# Altium PCB main.PcbDoc
Units mil, origin at the board's own origin, x right, y up, seen from the top; angles counter-clockwise.
Board outline 4763.78 x 9724.41 mil, 2 copper layers (Top Layer, Bottom Layer); 65 components, 26 nets, 174 pads, 17 vias.
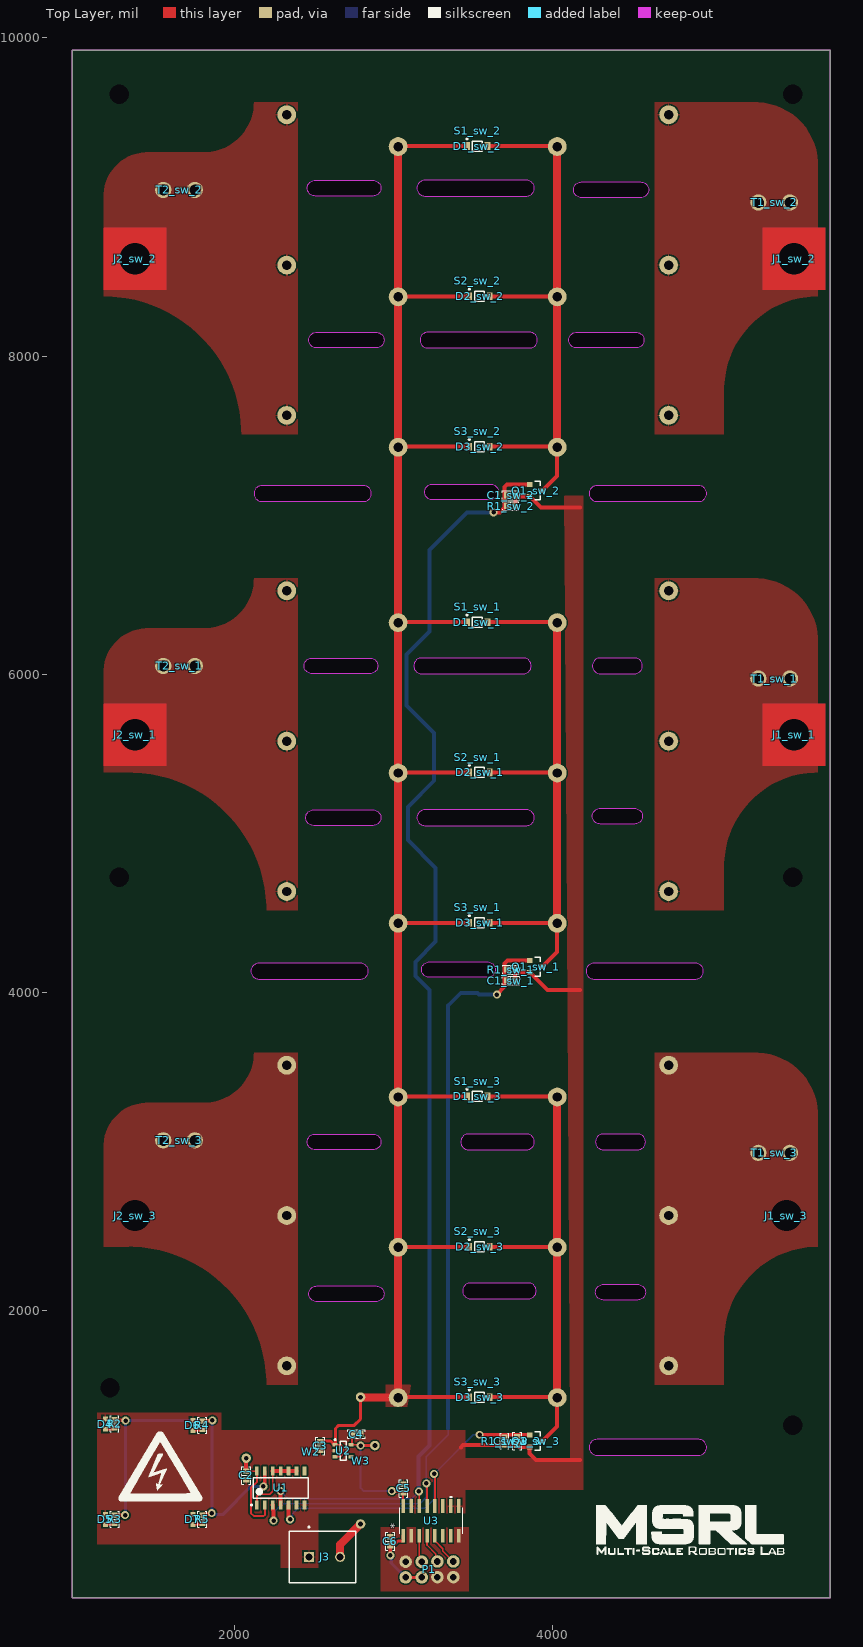
[diagram p0: Top Layer view]
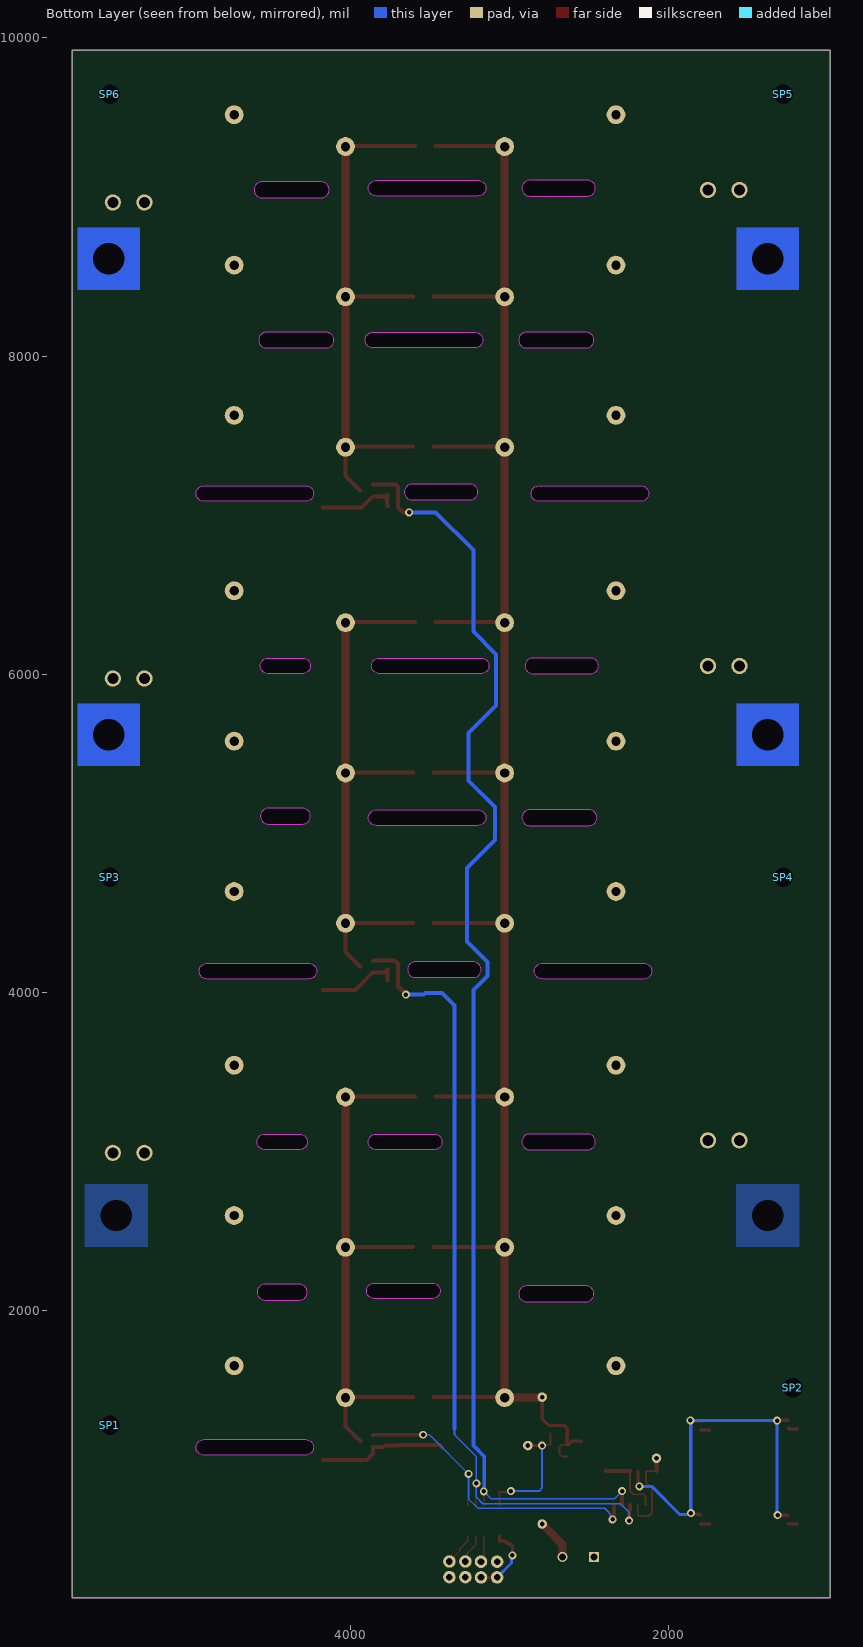
[diagram p1: Bottom Layer view, seen from below]
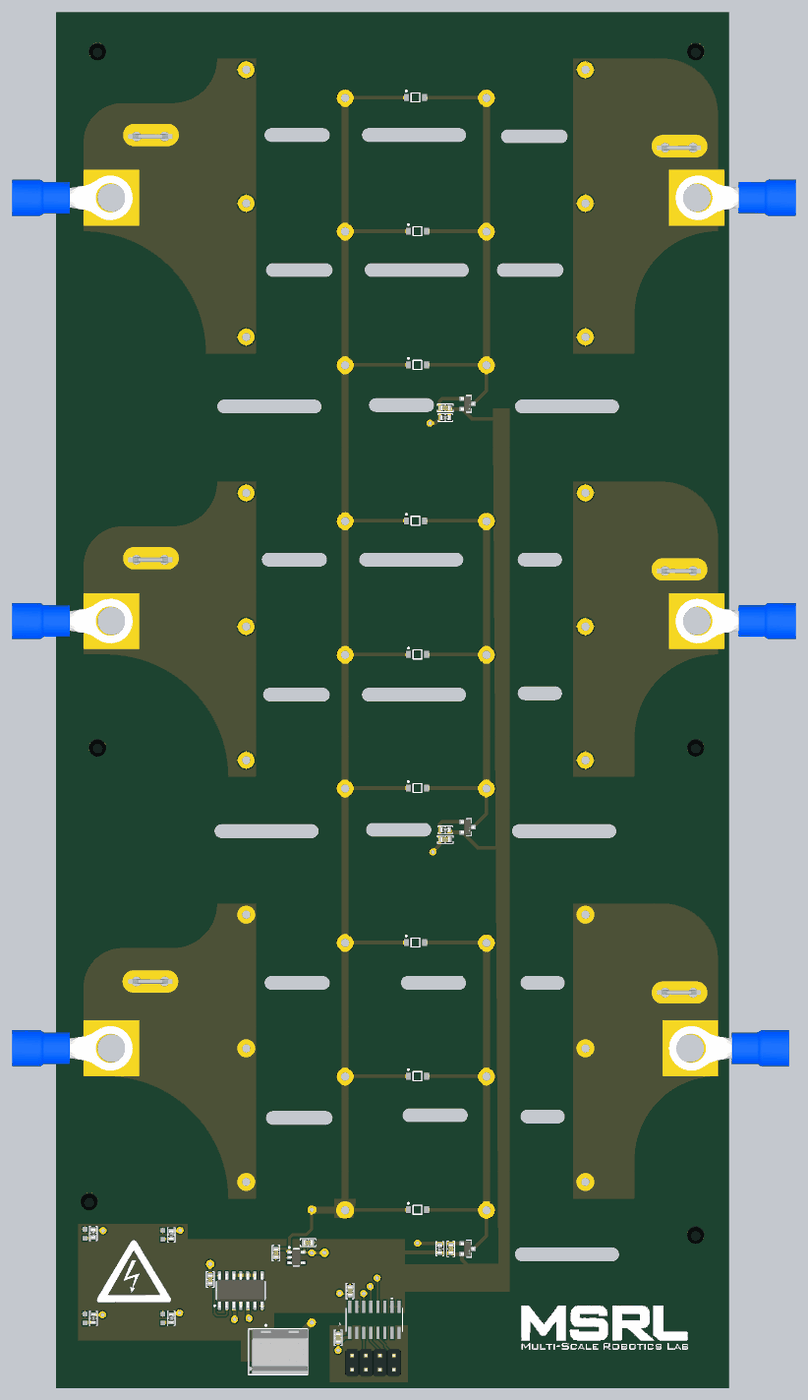
[diagram p2: 3D render of the assembled board from above, using the file's embedded part models]

## Layer stack, top to bottom
Top Solder: solder mask 0.4, Solder Resist, Dk 3.5
Top Layer: signal copper 1.4
Dielectric 1: dielectric 12.6, FR-4, Dk 4.8
Bottom Layer: signal copper 1.4
Bottom Solder: solder mask 0.4, Solder Resist, Dk 3.5

## Board outline
984.25,196.85 5748.03,196.85 5748.03,9921.26 984.25,9921.26
cut-out: 3436.88,2124.84 ccw(c3486.1,2124.84) 3486.1,2075.63 3850.27,2075.63 ccw(c3850.27,2124.84) 3899.48,2124.84 ccw(c3850.27,2124.84) 3850.27,2174.05 3486.1,2174.05 ccw(c3486.1,2124.84)
cut-out: 3474.41,3011.81 3838.58,3011.81 ccw(c3838.58,3061.02) 3887.8,3061.02 ccw(c3838.58,3061.02) 3838.58,3110.24 3474.41,3110.24 ccw(c3474.41,3061.02) 3425.2,3061.02 ccw(c3474.41,3061.02)
cut-out: 2509.84,3011.81 cw(c2509.84,3061.02) 2460.63,3061.02 cw(c2509.84,3061.02) 2509.84,3110.24 2874.02,3110.24 cw(c2874.02,3061.02) 2923.23,3061.02 cw(c2874.02,3061.02) 2874.02,3011.81
cut-out: 2519.68,2057.09 cw(c2519.68,2106.3) 2470.47,2106.3 cw(c2519.68,2106.3) 2519.68,2155.51 2893.7,2155.51 cw(c2893.7,2106.3) 2942.91,2106.3 cw(c2893.7,2106.3) 2893.7,2057.09
cut-out: 4281.5,1092.52 4921.26,1092.52 ccw(c4921.26,1141.73) 4970.47,1141.73 ccw(c4921.26,1141.73) 4921.26,1190.94 4281.5,1190.94 ccw(c4281.5,1141.73) 4232.28,1141.73 ccw(c4281.5,1141.73)
cut-out: 4320.87,2066.93 cw(c4320.87,2116.14) 4271.65,2116.14 cw(c4320.87,2116.14) 4320.87,2165.35 4537.4,2165.35 cw(c4537.4,2116.14) 4586.61,2116.14 cw(c4537.4,2116.14) 4537.4,2066.93
cut-out: 4320.87,3011.81 4537.4,3011.81 ccw(c4537.4,3061.02) 4586.61,3061.02 ccw(c4537.4,3061.02) 4537.4,3110.24 4320.87,3110.24 ccw(c4320.87,3061.02) 4271.65,3061.02 ccw(c4320.87,3061.02)
cut-out: 4301.18,6003.94 4517.72,6003.94 ccw(c4517.72,6053.15) 4566.93,6053.15 ccw(c4517.72,6053.15) 4517.72,6102.36 4301.18,6102.36 ccw(c4301.18,6053.15) 4251.97,6053.15 ccw(c4301.18,6053.15)
cut-out: 4301.18,5059.06 cw(c4301.18,5108.27) 4251.97,5108.27 cw(c4301.18,5108.27) 4301.18,5157.48 4517.72,5157.48 cw(c4517.72,5108.27) 4566.93,5108.27 cw(c4517.72,5108.27) 4517.72,5059.06
cut-out: 3179.13,6003.94 3818.9,6003.94 ccw(c3818.9,6053.15) 3868.11,6053.15 ccw(c3818.9,6053.15) 3818.9,6102.36 3179.13,6102.36 ccw(c3179.13,6053.15) 3129.92,6053.15 ccw(c3179.13,6053.15)
cut-out: 3198.82,5049.21 3838.58,5049.21 ccw(c3838.58,5098.43) 3887.8,5098.43 ccw(c3838.58,5098.43) 3838.58,5147.64 3198.82,5147.64 ccw(c3198.82,5098.43) 3149.61,5098.43 ccw(c3198.82,5098.43)
cut-out: 2155.51,4084.65 2795.28,4084.65 ccw(c2795.28,4133.86) 2844.49,4133.86 ccw(c2795.28,4133.86) 2795.28,4183.07 2155.51,4183.07 ccw(c2155.51,4133.86) 2106.3,4133.86 ccw(c2155.51,4133.86)
cut-out: 3228.35,4094.49 cw(c3228.35,4143.7) 3179.13,4143.7 cw(c3228.35,4143.7) 3228.35,4192.91 3592.52,4192.91 cw(c3592.52,4143.7) 3641.73,4143.7 cw(c3592.52,4143.7) 3592.52,4094.49
cut-out: 4261.81,4084.65 4901.57,4084.65 ccw(c4901.57,4133.86) 4950.79,4133.86 ccw(c4901.57,4133.86) 4901.57,4183.07 4261.81,4183.07 ccw(c4261.81,4133.86) 4212.6,4133.86 ccw(c4261.81,4133.86)
cut-out: 2500,5049.21 cw(c2500,5098.43) 2450.79,5098.43 cw(c2500,5098.43) 2500,5147.64 2874.02,5147.64 cw(c2874.02,5098.43) 2923.23,5098.43 cw(c2874.02,5098.43) 2874.02,5049.21
cut-out: 2490.16,6003.94 cw(c2490.16,6053.15) 2440.94,6053.15 cw(c2490.16,6053.15) 2490.16,6102.36 2854.33,6102.36 cw(c2854.33,6053.15) 2903.54,6053.15 cw(c2854.33,6053.15) 2854.33,6003.94
cut-out: 4153.54,8051.18 cw(c4153.54,8100.39) 4104.33,8100.39 cw(c4153.54,8100.39) 4153.54,8149.61 4527.56,8149.61 cw(c4527.56,8100.39) 4576.77,8100.39 cw(c4527.56,8100.39) 4527.56,8051.18
cut-out: 4183.07,8996.06 cw(c4183.07,9045.28) 4133.86,9045.28 cw(c4183.07,9045.28) 4183.07,9094.49 4557.09,9094.49 cw(c4557.09,9045.28) 4606.3,9045.28 cw(c4557.09,9045.28) 4557.09,8996.06
cut-out: 2509.84,9005.91 cw(c2509.84,9055.12) 2460.63,9055.12 cw(c2509.84,9055.12) 2509.84,9104.33 2874.02,9104.33 cw(c2874.02,9055.12) 2923.23,9055.12 cw(c2874.02,9055.12) 2874.02,9005.91
cut-out: 2519.68,8051.18 cw(c2519.68,8100.39) 2470.47,8100.39 cw(c2519.68,8100.39) 2519.68,8149.61 2893.7,8149.61 cw(c2893.7,8100.39) 2942.91,8100.39 cw(c2893.7,8100.39) 2893.7,8051.18
cut-out: 4281.5,7086.61 4921.26,7086.61 ccw(c4921.26,7135.83) 4970.47,7135.83 ccw(c4921.26,7135.83) 4921.26,7185.04 4281.5,7185.04 ccw(c4281.5,7135.83) 4232.28,7135.83 ccw(c4281.5,7135.83)
cut-out: 3248.03,7096.46 cw(c3248.03,7145.67) 3198.82,7145.67 cw(c3248.03,7145.67) 3248.03,7194.88 3612.2,7194.88 cw(c3612.2,7145.67) 3661.42,7145.67 cw(c3612.2,7145.67) 3612.2,7096.46
cut-out: 2175.2,7086.61 2814.96,7086.61 ccw(c2814.96,7135.83) 2864.17,7135.83 ccw(c2814.96,7135.83) 2814.96,7185.04 2175.2,7185.04 ccw(c2175.2,7135.83) 2125.98,7135.83 ccw(c2175.2,7135.83)
cut-out: 3218.5,8051.18 3858.27,8051.18 ccw(c3858.27,8100.39) 3907.48,8100.39 ccw(c3858.27,8100.39) 3858.27,8149.61 3218.5,8149.61 ccw(c3218.5,8100.39) 3169.29,8100.39 ccw(c3218.5,8100.39)
cut-out: 3198.82,9005.91 3838.58,9005.91 ccw(c3838.58,9055.12) 3887.8,9055.12 ccw(c3838.58,9055.12) 3838.58,9104.33 3198.82,9104.33 ccw(c3198.82,9055.12) 3149.61,9055.12 ccw(c3198.82,9055.12)

## Design rules (kind name [scope] priority, off if disabled: settings)
Clearance [All] p1: gap=10 ignorepadtopadclearanceinfootprint=FALSE except(0: Arc-Hole Track-Hole SMDPad-Hole THPad-Hole Via-Hole Fill-Hole Poly-Hole Region-Hole Text-Hole)
HoleSize [All] p1: absolutevalues=TRUE maxlimit=787.4 minlimit=1 maxpercent=80.000 minpercent=20.000
PolygonConnect [All] p1: connectstyle=Relief reliefconductorwidth=10 reliefentries=4 polygonreliefangle="90 Angle" airgapwidth=10
RoomDefinition sw_3 [InComponentClass('sw_3')] p1: confinementstyle=ConfineIn formatcopy=TRUE lockcomponents=FALSE outline 669.29,1034.37 6220.47,1034.37 6220.47,3937.01 669.29,3937.01
RoomDefinition sw_2 [InComponentClass('sw_2')] p2: confinementstyle=ConfineIn formatcopy=TRUE lockcomponents=FALSE outline 669.29,7007.87 6299.21,7007.87 6299.21,9910.51 669.29,9910.51
RoomDefinition sw_1 [InComponentClass('sw_1')] p3: confinementstyle=ConfineIn formatcopy=TRUE lockcomponents=FALSE outline 669.29,4015.75 6259.84,4015.75 6259.84,6918.39 669.29,6918.39
RoutingVias [All] p1: holewidth=28 width=50 viastyle="Through Hole" minholewidth=28 minwidth=50 maxholewidth=28 maxwidth=50
SilkToSolderMaskClearance [IsPad] p1: minsilkscreentomaskgap=4 clearancetoexposedcopper=TRUE
SolderMaskExpansion [All] p1: expansion=4 istentingtop=FALSE
Width [All] p1: maxlimit=100 minlimit=10 preferedwidth=10
28 further rules are at their usual default settings.

## Classes and differential pairs
component class main: C2 C3 C4 C5 C6 D4 D5 D6 D7 J3 P1 R2 R3 R4 R5 SP1 SP2 SP3 SP4 SP5 SP6 U1 U2 U3 W2 W3
component class sw_3: C1_sw_3 D1_sw_3 D2_sw_3 D3_sw_3 J1_sw_3 J2_sw_3 Q1_sw_3 R1_sw_3 S1_sw_3 S2_sw_3 S3_sw_3 T1_sw_3 T2_sw_3
channel class reed_switch: sw_1 sw_2 sw_3
component class sw_1: C1_sw_1 D1_sw_1 D2_sw_1 D3_sw_1 J1_sw_1 J2_sw_1 Q1_sw_1 R1_sw_1 S1_sw_1 S2_sw_1 S3_sw_1 T1_sw_1 T2_sw_1
component class sw_2: C1_sw_2 D1_sw_2 D2_sw_2 D3_sw_2 J1_sw_2 J2_sw_2 Q1_sw_2 R1_sw_2 S1_sw_2 S2_sw_2 S3_sw_2 T1_sw_2 T2_sw_2

## Components (designator, comment, footprint, x,y, rotation, side; value= is the part's Value field where it differs from the comment)
C1_sw_1 "10nF 0603" "CAP 0603_1608" 3740.16,4074.8 r0 top value=10nF (schematic designator C1)
C1_sw_2 "10nF 0603" "CAP 0603_1608" 3740.16,7125.98 r0 top value=10nF (schematic designator C1)
C1_sw_3 "10nF 0603" "CAP 0603_1608" 3779.53,1181.1 r270 top value=10nF (schematic designator C1)
C2 "0603 100nF" "CAP 0603_1608" 2076.77,964.57 r90 top
C3 "0603 1uF" "CAP 0603_1608" 2542.63,1149.98 r90 top
C4 "0603 2.2uF" "CAP 0603_1608" 2768.49,1224.79 r180 top
C5 "100nF 0603" "CAP 0603_1608" 3065.94,883.03 r270 top value=100nF
C6 "100nF 0603" "CAP 0603_1608" 2982.28,551.18 r270 top value=100nF
D1_sw_1 "MMSD4148T3G" ONSC-SOD-123-2-425-04_V 3528.94,6327.83 r0 top (schematic designator D1)
D1_sw_2 "MMSD4148T3G" ONSC-SOD-123-2-425-04_V 3528.94,9319.96 r0 top (schematic designator D1)
D1_sw_3 "MMSD4148T3G" ONSC-SOD-123-2-425-04_V 3528.94,3346.46 r0 top (schematic designator D1)
D2_sw_1 "MMSD4148T3G" ONSC-SOD-123-2-425-04_V 3543.31,5382.95 r0 top (schematic designator D2)
D2_sw_2 "MMSD4148T3G" ONSC-SOD-123-2-425-04_V 3543.31,8375.08 r0 top (schematic designator D2)
D2_sw_3 "MMSD4148T3G" ONSC-SOD-123-2-425-04_V 3543.31,2401.57 r0 top (schematic designator D2)
D3_sw_1 "MMSD4148T3G" ONSC-SOD-123-2-425-04_V 3543.31,4438.07 r0 top (schematic designator D3)
D3_sw_2 "MMSD4148T3G" ONSC-SOD-123-2-425-04_V 3543.31,7430.2 r0 top (schematic designator D3)
D3_sw_3 "MMSD4148T3G" ONSC-SOD-123-2-425-04_V 3543.31,1456.69 r0 top (schematic designator D3)
D4 "732-12018-1-ND" LED_YELLOW_0603 1190.94,1287.4 r90 top
D5 "732-12018-1-ND" LED_YELLOW_0603 1190.94,688.98 r90 top
D6 "732-12018-1-ND" LED_YELLOW_0603 1742.13,1279.53 r90 top
D7 "732-12018-1-ND" LED_YELLOW_0603 1742.13,688.98 r90 top
J1_sw_1 "M5 Lug" lug_pad_10mm_m5#1 5519.69,5619.22 r270 top (schematic designator J1)
J1_sw_2 "M5 Lug" lug_pad_10mm_m5#1 5519.69,8611.34 r270 top (schematic designator J1)
J1_sw_3 "M5 Lug" lug_pad_10mm_m5#2 5472.44,2598.43 r270 top (schematic designator J1)
J2_sw_1 "M5 Lug" lug_pad_10mm_m5#1 1377.95,5619.23 r90 top (schematic designator J2)
J2_sw_2 "M5 Lug" lug_pad_10mm_m5#1 1377.95,8611.36 r90 top (schematic designator J2)
J2_sw_3 "M5 Lug" lug_pad_10mm_m5#2 1377.95,2598.43 r90 top (schematic designator J2)
J3 "282836-2" TECO-282836-2_V 2568.9,452.76 r0 top
P1 "Header 4X2" HEADER_4_2 3228.35,374.02 r0 top
Q1_sw_1 "DMN6140L-13" FP-SOT23-MFG 3897.64,4162.48 r0 top (schematic designator Q1)
Q1_sw_2 "DMN6140L-13" FP-SOT23-MFG 3897.64,7154.61 r0 top (schematic designator Q1)
Q1_sw_3 "DMN6140L-13" FP-SOT23-MFG 3897.64,1181.1 r0 top (schematic designator Q1)
R1_sw_1 "0603 50k" "RES 0603_1608" 3740.16,4143.7 r0 top value=50k (schematic designator R1)
R1_sw_2 "0603 50k" "RES 0603_1608" 3740.16,7057.09 r0 top value=50k (schematic designator R1)
R1_sw_3 "0603 50k" "RES 0603_1608" 3700.79,1181.1 r270 top value=50k (schematic designator R1)
R2 "Res1" "RES 0603_1608" 1249.44,1289.37 r90 top value=1K
R3 "Res1" "RES 0603_1608" 1250,688.98 r90 top value=1K
R4 "Res1" "RES 0603_1608" 1800.62,1279.53 r90 top value=1K
R5 "Res1" "RES 0603_1608" 1800.62,688.97 r90 top value=1K
S1_sw_1 "Reed Relay 5A 3500kV / 7500kV (AC & DC)" reed_relay_comus_3350-4275-126 3531.5,6524.69 r180 top locked (schematic designator S1)
S1_sw_2 "Reed Relay 5A 3500kV / 7500kV (AC & DC)" reed_relay_comus_3350-4275-126 3531.5,9516.81 r180 top locked (schematic designator S1)
S1_sw_3 "Reed Relay 5A 3500kV / 7500kV (AC & DC)" reed_relay_comus_3350-4275-126 3531.5,3543.31 r180 top locked (schematic designator S1)
S2_sw_1 "Reed Relay 5A 3500kV / 7500kV (AC & DC)" reed_relay_comus_3350-4275-126 3531.5,5579.8 r180 top locked (schematic designator S2)
S2_sw_2 "Reed Relay 5A 3500kV / 7500kV (AC & DC)" reed_relay_comus_3350-4275-126 3531.5,8571.93 r180 top locked (schematic designator S2)
S2_sw_3 "Reed Relay 5A 3500kV / 7500kV (AC & DC)" reed_relay_comus_3350-4275-126 3531.5,2598.43 r180 top locked (schematic designator S2)
S3_sw_1 "Reed Relay 5A 3500kV / 7500kV (AC & DC)" reed_relay_comus_3350-4275-126 3531.5,4634.92 r180 top locked (schematic designator S3)
S3_sw_2 "Reed Relay 5A 3500kV / 7500kV (AC & DC)" reed_relay_comus_3350-4275-126 3531.5,7627.05 r180 top locked (schematic designator S3)
S3_sw_3 "Reed Relay 5A 3500kV / 7500kV (AC & DC)" reed_relay_comus_3350-4275-126 3531.5,1653.54 r180 top locked (schematic designator S3)
SP1 "hex_spacer" hex_spacer 5511.8,1279.53 r180 bottom
SP2 "hex_spacer" hex_spacer 1220.47,1515.75 r180 bottom
SP3 "hex_spacer" hex_spacer 5511.8,4724.41 r180 bottom
SP4 "hex_spacer" hex_spacer 1279.52,4724.41 r180 bottom
SP5 "hex_spacer" hex_spacer 1279.52,9645.67 r180 bottom
SP6 "hex_spacer" hex_spacer 5511.8,9645.67 r180 bottom
T1_sw_1 "pwr_connector_quick" pcb_quick_power_connector 5393.7,5973.5 r180 top (schematic designator T1)
T1_sw_2 "pwr_connector_quick" pcb_quick_power_connector 5393.7,8965.63 r180 top (schematic designator T1)
T1_sw_3 "pwr_connector_quick" pcb_quick_power_connector 5393.7,2992.13 r180 top (schematic designator T1)
T2_sw_1 "pwr_connector_quick" pcb_quick_power_connector 1653.54,6052.24 r180 top (schematic designator T2)
T2_sw_2 "pwr_connector_quick" pcb_quick_power_connector 1653.54,9044.37 r180 top (schematic designator T2)
T2_sw_3 "pwr_connector_quick" pcb_quick_power_connector 1653.54,3070.87 r180 top (schematic designator T2)
U1 "CD74HC4002MT" D0014A_N 2293.31,885.83 r90 top
U2 "TPS76050DBVR" DBV0005A_L 2686.02,1120.08 r0 top
U3 "ADUM130E0BRZ" R_16 3238.19,679.13 r90 top
W2 "wire_jumper" wire_jumper#1 2047.24,324.8 r90 top
W3 "wire_jumper" wire_jumper#2 2824.8,403.54 r90 top

## Footprints (in the part's own frame and the unit in brackets; to place one, negate y for a bottom-side part, rotate by r counter-clockwise, add the part's x,y. Pads: shape width x height; smd on the part's side, far side on the other; paste and mask are expansions set on the pad)
"CAP 0603_1608" [mm] "Chip Capacitor, 2-Leads, Body 1.60x0.80mm, IPC Medium Density"
  rect 0.9x1 smd: 1(-0.675,0) 2(0.675,0)
  silkscreen extent -1.4,-0.7 1.4,0.7, body extent -0.8,-0.41 0.8,0.41, height 0.82
D0014A_N [mm] "SOIC, 14-Leads, Body 8.75x4mm, Pitch 1.27mm, IPC Medium Density"
  rrect17% 1.45x0.6 smd: 1(-2.725,3.81) 2(-2.725,2.54) 3(-2.725,1.27) 4(-2.725,0) 5(-2.725,-1.27) 6(-2.725,-2.54) 7(-2.725,-3.81) 8(2.725,-3.81) 9(2.725,-2.54) 10(2.725,-1.27) 11(2.725,0) 12(2.725,1.27) 13(2.725,2.54) 14(2.725,3.81)
  silkscreen extent -2.85,-4.38 1.6,4.78, body extent -3.02,-4.32 3.02,4.32, height 1.59
DBV0005A_L [mm] "SOT23, 5-Leads, Body 3.05x1.75mm, Pitch 0.95mm, IPC High Density"
  rrect18% 0.8x0.55 smd: 1(-1.275,0.95) 2(-1.275,0) 3(-1.275,-0.95) 4(1.275,-0.95) 5(1.275,0.95)
  silkscreen extent -1.4,-1.55 0.5,1.9, body extent -1.42,-1.46 1.42,1.46, height 1.08
FP-SOT23-MFG [mm]
  rect 0.9x0.8 smd paste+0 mask+0: 1(-1,0.95) 2(-1,-0.95) 3(1,0)
  silkscreen extent -0.18,-1.5 0.7,1.5, body extent -1.55,-1.6 1.55,1.6, height 0.25
HEADER_4_2 [mm]
  round 2 hole 1.05: 1(-3.81,-1.27) 2(-3.81,1.23) 3(-1.23,-1.27) 4(-1.23,1.23) 5(1.27,-1.23) 6(1.27,1.27) 7(3.81,-1.23) 8(3.81,1.27)
  body extent -5.02,-2.46 5.02,2.54, height 10.54
hex_spacer [mil]
  round 60 hole 122.05: 6(0,0)
  body extent -98,-118 98,109, height 354
LED_YELLOW_0603 [mm]
  rect 0.8x0.8 smd: A(-0.8,0) C(0.8,0)
  body extent -0.8,-0.4 0.8,0.4, height 0.4
lug_pad_10mm_m5#1 [mm]
  rect 1x1 hole 5: 1(0,0)
  Top Layer region: -5,-5 5,-5 5,5 -5,5
  Bottom Layer region: -5,-5 5,-5 5,5 -5,5
  body extent -4,-3.8 4,17.8, height 5.25
lug_pad_10mm_m5#2 [mm]
  rect 1x1 hole 5: 1(0,0)
  body extent -4,-3.8 4,17.8, height 5.25
ONSC-SOD-123-2-425-04_V [mm] "SOD, 2-Leads, Body 2.69x1.6mm"
  rect 0.91x1.22 smd: 1(-1.635,0) 2(1.635,0)
  silkscreen extent -1.76,-0.8 0.78,1.28, body extent -1.35,-0.8 1.35,0.8, height 1.35
pcb_quick_power_connector [mm]
  round 2.6 hole 1.75: 1(-2.543,0) 1(2.492,0)
  body extent -3.94,-0.41 3.94,0.41, height 10.28
R_16 [mm]
  rect 2.181x0.561 smd paste+0 mask+0: 1(-2.365,4.445) 2(-2.365,3.175) 3(-2.365,1.905) 4(-2.365,0.635) 5(-2.365,-0.635) 6(-2.365,-1.905) 7(-2.365,-3.175) 8(-2.365,-4.445) 9(2.365,-4.445) 10(2.365,-3.175) 11(2.365,-1.905) 12(2.365,-0.635) 13(2.365,0.635) 14(2.365,1.905) 15(2.365,3.175) 16(2.365,4.445)
  silkscreen extent -2.08,-5.08 3.96,5.08, body extent 0,0 0.25,0.25, height 0.25
reed_relay_comus_3350-4275-126 [mm]
  round 3 hole 1.5: 1(30.48,0) 2(12.7,5.08) 3(-12.7,5.08) 4(-30.48,0)
  body extent -36.83,-9.53 39.37,9.53, height 20.57
"RES 0603_1608" [mm] "Chip Resistor, 2-Leads, Body 1.60x0.80mm, IPC Medium Density"
  rect 0.85x0.95 smd: 1(-0.65,0) 2(0.65,0)
  silkscreen extent -1.27,-0.7 1.27,0.7, body extent -0.8,-0.4 0.8,0.4, height 0.45
TECO-282836-2_V [mm] "Female Header, Pitch 5mm, 1 x 2 Position, Height 10mm"
  rect 1.6x1.6 hole 1.1: 1(-2.5,0)
  round 1.6 hole 1.1: 2(2.5,0)
  silkscreen extent -5.6,-4.1 5,4.87, body extent -5.6,-4.1 5,4.1, height 10
wire_jumper#1 [mil]
  round 60 hole 30: 1(827.89,-838.26) 2(748.03,-29.53)
wire_jumper#2 [mil]
  round 60 hole 30: 1(255.91,29.53) 2(1053.15,29.53)

## Part data
C1_sw_1 C1_sw_2 C1_sw_3 C2 C3 C4 C5 C6: library part Cap, "Capacitor", LatestRevisionDate=17-Jul-2002, LatestRevisionNote="Re-released for DXP Platform.", PackageDescription="Radial Cap, Thru-Hole; 2 Leads; 0.3 in Pin Spacing", PackageReference=RAD-0.3, Published=8-Jun-2000, Publisher="Altium Limited"
D1_sw_1 D1_sw_2 D1_sw_3 D2_sw_1 D2_sw_2 D2_sw_3 D3_sw_1 D3_sw_2 D3_sw_3: library part CMP-0895-00002-2, "Switching Diode, 2-Pin SOD-123, Pb-Free, Tape and Reel", Manufacturer="On Semiconductor", ComponentLink1Description="Manufacturer URL", ComponentLink1URL=http://www.onsemi.com/, ComponentLink2Description=Datasheet, ComponentLink2URL=http://www.onsemi.com/pub_link/Collateral/MMSD4148T1-D.PDF, ComponentLink3Description="Package Specification", ComponentLink3URL=http://www.onsemi.com/pub_link/Collateral/425-04.PDF, Configuration=Single, DatasheetVersion="Rev. 11", IF Max (A)=0.2, Mounting Technology="Surface Mount", PackageDescription="2-Pin SOD, Body 1.6 x 2.69 mm", PackageReference=SOD-123-2-425-04, PackageVersion="Rev. G, 10/2009", Packing="Tape and Reel", PartNumber=MMSD4148T3G, RoHS=TRUE, trr Max (ns)=4
D4 D5 D6 D7: library part led_yellow_0603, Supplier 1=Digi-Key, Supplier Part Number 1=732-12018-1-ND
J1_sw_1 J1_sw_2 J1_sw_3 J2_sw_1 J2_sw_2 J2_sw_3: library part lug_pad_10mm_m5
J3: library part CMP-1684-00017-1, "Female Header, Pitch 5 mm, 1 x 2 Position, Height 10 mm, Tail Length 3.5 mm, Rohs, Bulk", Color=Green, Current=13.5A, Manufacturer="TE Connectivity", Package Description="Female Header, Pitch 5 mm, 1 x 2 Position, Height 10 mm, Tail Length 3.5 mm", Package Reference=THD, Standard Package=300, Voltage=300V, 3D Model=282836-2.pdf, Category=Connectors,Interconnects, Clamp Material - Plating=Brass-NickelPlated, Contact Material - Plating=Brass-TinPlated, Datasheet URL=http://www.te.com.cn/commerce/DocumentDelivery/DDEController?Action=showdoc&DocId=Catalog+Section%7F1308389_EUROSTYLE_TERMINAL_BLOCKS%7F0607%7Fpdf%7FEnglish%7FENG_CS_1308389_EUROSTYLE_TERMINAL_BLOCKS_0607.pdf%7F282836-2, Dynamic Catalog=BuchananSeries, Family=TerminalBlocks-WiretoBoard, Featured Product=EurostyleTerminalBlockConnectors, Features=Interlocking(Side), Housing Material=Polyamide(PA66),Nylon6/6, Manufacturer URL=http://www.te.com, Mating Orientation=HorizontalwithBoard, Mounting Type=ThroughHole, Number of Levels=1, Other Names="5ULV-02B / A98076", Packaging=Bulk, Pitch="0.197\"(5.00mm)", Positions Per Level=2, Product Training Modules=Wire-to-BoardEurostyleTerminalBlocks, RoHS Information=282836-2StatementofCompliance, Screw Material - Plating=Brass-NickelPlated, Screw Thread=M3, Series=Buchanan, Torque - Screw=0.68Nm(6Lb-In), Wire Gauge=16-30AWG, Wire Termination=Screw-RisingCageClamp
P1: "Header, 4-Pin, Dual row", LatestRevisionDate=17-Jul-2002, LatestRevisionNote="Re-released for DXP Platform.", Publisher="Altium Limited"
Q1_sw_1 Q1_sw_2 Q1_sw_3: library part CMP-12801-000047-1, "MOSFET N-CH 60V 1.6A SOT23", Continuous Drain Current=1.6A, Drain To Source Breakdown Voltage=60V, Drain To Source Resistance=92mΩ, Gate To Source Voltage=20V, Input Capacitace At Vds="315pF @ 40V", Manufacturer="Diodes Inc.", Max Forward Diode Voltage=1V, Max Junction Temp=+150°C, Package=SOT23, Power Dissipation=0.7W, Pulse Drain Current=10A, Temperature="-55°C to +150°C", Temperature Range Low=-55°C, Typ Forward Diode Voltage=0.75V, Automotive=No, Category=Trans, ComponentLink2Description=Datasheet, ComponentLink2URL=https://www.diodes.com/assets/Datasheets/DMN6140L.pdf, Depletion Mode=False, Device Class L1="Discrete Semiconductors", Device Class L2=Transistors, Device Class L3=MOSFETs, Digikey Description="MOSFET N-CH 60V 1.6A SOT23", Drain To Source Voltage=60V, Footprint Url=https://www.diodes.com/assets/Package-Files/SOT23.pdf, Gate Charge At Vgs="8.6nC @ 10V", Height=1.1mm, Lead Free=Yes, Manufacturer Part Number=DMN6140L-13, Mouser Description="MOSFET 31V to 99V N-Ch FET 60Vds 20Vgs 2.3A", Number of Channels=1, Number Of N Channels=1, Octopart=https://octopart.com/dmn6140l-13-diodes+inc.-38898616, Reverse Recovery Charge=9nC, Reverse Recovery Time=16.8ns, RoHS=TRUE, Rthja Max=183°C/W, Standoff Height=0.013mm, Temperature Range High=+150°C, Threshold Vgs Max=3V, Threshold Vgs Min=1V, Turn Off Delay Time=16.3ns, Turn On Delay Time=2.6ns
R1_sw_1 R1_sw_2 R1_sw_3: library part Res1, "Resistor", LatestRevisionDate=17-Jul-2002, LatestRevisionNote="Re-released for DXP Platform.", PackageDescription="Axial Device, Thru-Hole; 2 Leads; 0.3 in Pin Spacing", PackageReference=AXIAL-0.3, Published=8-Jun-2000, Publisher="Altium Limited"
R2 R3 R4 R5: "Resistor", LatestRevisionDate=17-Jul-2002, LatestRevisionNote="Re-released for DXP Platform.", PackageDescription="Axial Device, Thru-Hole; 2 Leads; 0.3 in Pin Spacing", PackageReference=AXIAL-0.3, Published=8-Jun-2000, Publisher="Altium Limited"
S1_sw_1 S1_sw_2 S1_sw_3 S2_sw_1 S2_sw_2 S2_sw_3 S3_sw_1 S3_sw_2 S3_sw_3: library part reed_relay_3350-4275-126, "3500kV (AC & DC) breaking capacity @ 200W / 7500kV (AC & DC) minimum dielectric strength", Supplier Part Number 1=1835-1040-ND, Supplier 1=Digi-Key
T1_sw_1 T1_sw_2 T1_sw_3 T2_sw_1 T2_sw_2 T2_sw_3: Supplier Part Number 1=WM2984CT-ND, Supplier 1=Digi-Key
U1: library part CMP-0806-00012-3, "High Speed CMOS Logic Dual 4-Input NOR Gates, D0014A, SMALL T&R", F @ Nom Voltage(Max)(Mhz)=70, Generic Part Number=CD74HC4002, ICC @ Nom Voltage(Max)(mA)=0.02, Manufacturer="Texas Instruments", Operating Temperature Range(C)="-55 to 125", Rating=Catalog, tpd @ Nom Voltage(Max)(ns)=25, Voltage(Nom)(V)=5, Bits(#)=2, Code_JEDEC=MS-012, DatasheetVersion=SCHS197E, Input Type=CMOS, Output Drive (IOL/IOH)(Max)(mA)=5.2/-5.2, Output Type=CMOS, PackageReference=D0014A, PackageVersion=http://www.ti.com/lit/ml/mpds177g/mpds177g.pdf, VCC(Max)(V)=6, VCC(Min)(V)=2
U2: library part CMP-0394-00477-2, "Single Output LDO, 50 mA, Fixed 5 V Output, 5.2 to 16 V Input, with Low IQ, 5-pin SOT-23 (DBV), -40 to 125 degC, Green (RoHS & no Sb/Br)", Manufacturer="Texas Instruments", Rating=Catalog, Accuracy(%)=2, Code_JEDEC=MO-178, ComponentLink1Description="Manufacturer URL", ComponentLink1URL=http://www.ti.com/, ComponentLink2Description=Datasheet, ComponentLink2URL=http://www.ti.com/general/docs/lit/getliterature.tsp?genericPartNumber=TPS76050&fileType=pdf, ComponentLink3Description="Package Specification", ComponentLink3URL=http://www.ti.com/litv/pdf/mpds018i, DatasheetVersion=SLVS144D, Eco-Plan="Green (RoHS & no Sb/Br)", Fixed Output Options(V)=5, Iout(Max)(A)=0.05, Iq(Typ)(mA)=0.8, Mounting Technology="Surface Mount", PackageDescription="5-Pin Plastic Small Outline, Body 1.60 Ãƒâ€” 2.90 mm, Pitch 0.95 mm", PackageReference=DBV0005A, PackageVersion=4073253-4/K, PartNumber=TPS76050DBVR, SubFamily="Single Channel LDO", Vdo(Typ)(mV)=120, Vin(Max)(V)=16, Vin(Min)(V)=5.2, Vout Adj(Max)(V)=5, Vout Adj(Min)(V)=5
U3: "No Description Available", Mfr_Name="Analog Devices Inc", Copyright="Copyright (C) 2021 Ultra Librarian. All rights reserved.", Digi-Key_Part_Number_1=ADUM130E0BRZ-ND, Manufacturer_Part_Number=ADUM130E0BRZ, RefDes=RefDes, Type=DEV

## Via types
v1: diameter 50, hole 28, Top Layer to Bottom Layer, 17 vias

## Nets (pads, with @x,y where several pads share a name; then routed paths per layer and width w, separated by ;. In a path a pad name is that pad's centre, name@x,y a point inside that pad or via, vN(x,y) a via of type N, cw(c..) or ccw(c..) an arc to the next point about the centre after c; other vN are vias at no path point)
+5: C2.2 C4.2 C5.2 U1.2 U1.14 U2.5 U3.16 W2.1 W2.2 | length 1442.8
  Top Layer w12: C2.2 2141.34,991.14 U1.14 2143.31,922.83 2106.3,885.83 2106.3,728.35 2125.98,708.66 2185.04,708.66 2194.88,718.5 2194.88,776.97 U1.2 ; U2.5 2789.37,1157.48 v1(2795.28,1151.57) ; U2.5@2742.13,1162.31 C4.2@2742.13,1228.35 ; v1(2992.13,866.14) 2996.97,861.3 3061.1,861.3 C5.2 3063.19,853.71 U3.16
  Top Layer w20: v1(2795.28,1151.57) 2795.83,1152.13 2884.95,1152.13 W2.1
  Top Layer w25: C2.2 W2.2
  Bottom Layer w12: v1(2795.28,1151.57) 2795.28,885.83 2814.96,866.14 v1(2992.13,866.14)
+5D: C6.2 P1.1 P1.3 U3.1 | length 467
  Top Layer w20: v1(2982.28,462.6) C6.2 2990,532.32 3009.49,532.32 3030.25,553.09 3062.15,553.09 3063.19,554.13 U3.1 ; P1.1 P1.3
  Bottom Layer w20: v1(2982.28,462.6) 2988.02,456.86 2988.02,414.34 P1.1
+12: C3.2 D1_sw_1.1 D1_sw_2.1 D1_sw_3.1 D2_sw_1.1 D2_sw_2.1 D2_sw_3.1 D3_sw_1.1 D3_sw_2.1 D3_sw_3.1 J3.2 S1_sw_1.2 S1_sw_2.2 S1_sw_3.2 S2_sw_1.2 S2_sw_2.2 S2_sw_3.2 S3_sw_1.2 S3_sw_2.2 S3_sw_3.2 U2.1 U2.3 W3.1 W3.2 | length 13016.3
  Top Layer w12: U2.3 2667.32,1082.68 2687.01,1102.36 2687.01,1141.73 2671.26,1157.48 U2.1@2636.97,1157.48
  Top Layer w20: C3.2@2548.23,1176.18 2553.15,1181.1 2607.28,1181.1 2630.91,1157.48 U2.1 2636.97,1157.48 2637.8,1158.31 2637.8,1259.84 2657.48,1279.53 2755.91,1279.53 2795.28,1318.9 W3.2
  Top Layer w25: S3_sw_3.2@3031.5,1456.69 D3_sw_3.1 ; S2_sw_3.2@3031.5,2401.57 D2_sw_3.1 ; S1_sw_3.2 3031.5,3346.46 D1_sw_3.1 ; S3_sw_1.2@3031.5,4438.07 D3_sw_1.1 ; S2_sw_1.2@3031.5,5382.95 D2_sw_1.1 ; S1_sw_1.2 3031.5,6327.83 D1_sw_1.1 ; S3_sw_2.2@3031.5,7430.2 D3_sw_2.1 ; S2_sw_2.2@3031.5,8375.08 D2_sw_2.1 ; S1_sw_2.2 3031.5,9319.96 D1_sw_2.1
  Top Layer w50: J3.2 2667.32,531.5 W3.1 ; W3.2 2796.85,1455.12 3029.92,1455.12 S3_sw_3.2 ; S3_sw_3.2@3031.5,1456.69 S2_sw_3.2 3031.5,2401.57 S1_sw_3.2 ; S1_sw_3.2@3031.5,3346.46 S3_sw_1.2 ; S3_sw_1.2@3031.5,4438.07 S2_sw_1.2 3031.5,5382.95 S1_sw_1.2 ; S1_sw_1.2@3031.5,6327.83 S3_sw_2.2 ; S3_sw_2.2@3031.5,7430.2 S2_sw_2.2 3031.5,8375.08 S1_sw_2.2
DGND: C6.1 P1.2 P1.5 P1.7 U3.2 U3.8
en_cap_1: C1_sw_1.1 Q1_sw_1.1 R1_sw_1.1 U1.3 U3.13 | length 5166.1
  Top Layer w10: v1(3208.66,915.35) 3213.19,910.83 U3.13
  Top Layer w25: U1.3 2244,777.85 2244,748.58 2249.01,743.57 v1(2249.01,681.07) ; v1(3651.57,3986.22) 3651.57,3987.99 3700.79,4037.21 3700.79,4181.23 3719.43,4199.88 Q1_sw_1.1
  Bottom Layer w10: v1(2249.01,681.07) 2249.01,721.07 2248.24,721.84 2248.24,732.49 2303.15,787.4 3169.29,787.4 3208.66,826.77 v1(3208.66,915.35) 3208.66,1082.68 3346.46,1220.47 3346.46,1259.84
  Bottom Layer w25: 3346.46,1259.84 3346.46,3917.32 3425.2,3996.06 3530.08,3996.06 3539.92,3986.22 v1(3651.57,3986.22)
en_cap_2: C1_sw_2.1 Q1_sw_2.1 R1_sw_2.1 U1.4 U3.14 | length 8274
  Top Layer w10: v1(3162.57,864.64) 3163.19,864.03 U3.14
  Top Layer w25: U1.4 v1(2293.31,866.14) ; v1(3631.89,7017.72) 3671.26,7017.72 3700.79,7047.24 3700.79,7177.36 3715.43,7192.01 Q1_sw_2.1
  Bottom Layer w10: v1(2293.31,866.14) 2342.52,816.93 3114.86,816.93 v1(3162.57,864.64)
  Bottom Layer w25: v1(3162.57,864.64) 3161.82,865.39 3159.45,867.77 3159.45,1082.68 3228.35,1151.58 3228.35,1279.53 3228.35,4015.75 3139.76,4104.33 3139.76,4192.91 3267.72,4320.87 3267.72,4783.46 3092.59,4958.59 3092.59,5165.59 3257.87,5330.87 3257.87,5629.92 3085.21,5802.58 3085.21,6125.07 3228.35,6268.2 3228.35,6781.5 3464.57,7017.72 v1(3631.89,7017.72)
en_cap_3: C1_sw_3.1 Q1_sw_3.1 R1_sw_3.1 U1.5 U3.12 | length 2143.4
  Top Layer w10: v1(3257.87,974.41) 3263.19,969.09 U3.12
  Top Layer w25: U1.5 2343.31,704.8 2352.36,695.74 v1(2352.36,688.98) ; v1(3543.31,1220.47) 3858.27,1220.47 Q1_sw_3.1
  Bottom Layer w10: v1(2352.36,688.98) 2352.36,698.79 2368.4,714.83 2368.4,724.7 2380.8,737.09 2401.57,757.87 3198.82,757.87 3257.87,816.93 v1(3257.87,974.41) 3503.31,1219.84 3542.68,1219.84 v1(3543.31,1220.47)
  Bottom Layer w25: v1(2352.36,688.98) v1@2362.2,679.13
GND: C1_sw_1.2 C1_sw_2.2 C1_sw_3.2 C2.1 C3.1 C4.1 C5.1 D4.C D5.C D6.C D7.C J3.1 Q1_sw_1.2 Q1_sw_2.2 Q1_sw_3.2 R1_sw_1.2 R1_sw_2.2 R1_sw_3.2 U1.7 U2.2 U3.9 U3.10 U3.15 | length 1854.6
  Top Layer w25: 3425.2,1141.73 3438.98,1155.51 R1_sw_3.2 3704.72,1151.57 3784.45,1151.57 3792.32,1143.7 Q1_sw_3.2 3858.27,1102.36 3897.64,1062.99 4173.23,1062.99 ; R1_sw_1.2 3765.75,4141.73 R1_sw_1.2@3766.24,4141.24 ; R1_sw_2.2 3769.68,7061.02 3769.68,7123.03 C1_sw_2.2 3766.73,7124.02 3771.95,7118.8 3785,7118.8 3786.59,7117.2 Q1_sw_2.2 ; C1_sw_1.2 3766.24,4075.3 R1_sw_1.2@3766.24,4141.24 ; Q1_sw_2.2@3860.24,7117.2 3930.2,7047.24 4173.23,7047.24 ; 4173.23,4015.75 3969.57,4015.75 3860.24,4125.08 Q1_sw_1.2 3788.31,4125.08 3775.89,4137.5 3769.98,4137.5 R1_sw_1.2@3766.24,4141.24
NetD1_sw_1_2: D1_sw_1.2 D2_sw_1.2 D3_sw_1.2 Q1_sw_1.3 S1_sw_1.3 S2_sw_1.3 S3_sw_1.3 | length 3545
  Top Layer w25: D1_sw_1.2 4031.5,6327.83 S1_sw_1.3@4055.12,6327.83 ; D3_sw_1.2 4031.5,4438.07 4015.75,4422.32 4015.75,4398.7 4027.86,4398.7 4031.5,4395.06 4031.5,4255 3938.98,4162.48 Q1_sw_1.3 ; D2_sw_1.2 S2_sw_1.3@4031.5,5382.95
  Top Layer w50: S3_sw_1.3@4031.5,4438.07 4031.5,5382.95 4031.5,6304.21 S1_sw_1.3@4055.12,6327.83
NetD1_sw_2_2: D1_sw_2.2 D2_sw_2.2 D3_sw_2.2 Q1_sw_2.3 S1_sw_2.3 S2_sw_2.3 S3_sw_2.3 | length 3545
  Top Layer w25: D1_sw_2.2 4031.5,9319.96 S1_sw_2.3@4055.12,9319.96 ; D3_sw_2.2 4031.5,7430.2 4015.75,7414.45 4015.75,7390.83 4027.86,7390.83 4031.5,7387.19 4031.5,7247.13 3938.98,7154.61 Q1_sw_2.3 ; D2_sw_2.2 S2_sw_2.3@4031.5,8375.08
  Top Layer w50: S3_sw_2.3@4031.5,7430.2 4031.5,8375.08 4031.5,9296.34 S1_sw_2.3@4055.12,9319.96
NetD1_sw_3_2: D1_sw_3.2 D2_sw_3.2 D3_sw_3.2 Q1_sw_3.3 S1_sw_3.3 S2_sw_3.3 S3_sw_3.3 | length 3545
  Top Layer w25: D1_sw_3.2 4031.5,3346.46 S1_sw_3.3@4055.12,3346.46 ; D3_sw_3.2 4031.5,1456.69 4015.75,1440.94 4015.75,1417.32 4027.86,1417.32 4031.5,1413.68 4031.5,1273.62 3938.98,1181.1 Q1_sw_3.3 ; D2_sw_3.2 S2_sw_3.3@4031.5,2401.57
  Top Layer w50: S3_sw_3.3@4031.5,1456.69 4031.5,2401.57 4031.5,3322.83 S1_sw_3.3@4055.12,3346.46
NetD4_A: D4.A R2.1 | length 61.8
  Top Layer w20: D4.A 1239.6,1255.91 1247.47,1263.78 R2.1
NetD5_A: D5.A R3.1 | length 61.5
  Top Layer w20: D5.A 1193.9,660.43 1247.05,660.43 R3.1
NetD6_A: D6.A R4.1 | length 60.9
  Top Layer w20: D6.A 1745.08,1250.98 1797.67,1250.98 R4.1
NetD7_A: D7.A R5.1 | length 60.9
  Top Layer w20: D7.A 1745.08,660.43 1797.67,660.43 R5.1
NetJ1_sw_1_1: J1_sw_1.1 S1_sw_1.4 S2_sw_1.4 S3_sw_1.4 T1_sw_1.1
NetJ1_sw_2_1: J1_sw_2.1 S1_sw_2.4 S2_sw_2.4 S3_sw_2.4 T1_sw_2.1
NetJ1_sw_3_1: J1_sw_3.1 S1_sw_3.4 S2_sw_3.4 S3_sw_3.4 T1_sw_3.1
NetJ2_sw_1_1: J2_sw_1.1 S1_sw_1.1 S2_sw_1.1 S3_sw_1.1 T2_sw_1.1
NetJ2_sw_2_1: J2_sw_2.1 S1_sw_2.1 S2_sw_2.1 S3_sw_2.1 T2_sw_2.1
NetJ2_sw_3_1: J2_sw_3.1 S1_sw_3.1 S2_sw_3.1 S3_sw_3.1 T2_sw_3.1
NetP1_4: P1.4 U3.3 | length 170.5
  Top Layer w10: U3.3 3163.19,457.77 3179.92,441.04 P1.4
NetP1_6: P1.6 U3.4 | length 189
  Top Layer w10: U3.4 3213.19,526.97 3268.8,471.36 3268.8,433.56 P1.6
NetP1_8: P1.8 U3.5 | length 209.7
  Top Layer w10: U3.5 3263.19,554.13 3312.56,504.75 3312.56,489.8 P1.8
NetR2_2: R2.2 R3.2 R4.2 R5.2 U1.13 | length 2500.7
  Top Layer w20: R2.2 1252.39,1312.01 1315.95,1312.01 v1(1318.9,1309.06) ; R3.2 1250.28,714.85 1315.11,714.85 v1(1315.39,715.13) ; R5.2 1807.35,721.3 1845.07,721.3 1852.12,728.35 v1(1860.24,728.35) ; R4.2 1803.77,1308.26 1860.62,1308.26 v1(1863.76,1311.41) ; v1(2185.04,895.67) 2193.31,903.94 U1.13
  Bottom Layer w20: v1(1315.39,715.13) 1318.9,718.63 v1(1318.9,1309.06) 1861.41,1309.06 v1@1862,1309.65 ; v1(1863.76,1311.41) v1@1862,1309.65 ; v1(2185.04,895.67) 2106.3,895.67 1929.13,718.5 1860.24,718.5 1862,720.27 v1@1862,1309.65
NetU1_1: U1.1 U1.9 U1.10 U1.11 U1.12 | length 446.3
  Top Layer w12: U1.1 2145.67,780.91 2145.67,836.61 2155.51,846.46 2224.41,846.46 2243.31,865.35 U1.12
  Top Layer w25: U1.12 U1.11 U1.10 U1.9
pads on no net: SP1.6 SP2.6 SP3.6 SP4.6 SP5.6 SP6.6 U1.6 U1.8 U2.4 U3.6 U3.7 U3.11

## Polygon pours and split planes (outlines as drawn)
no net on Top Solder "NONET_L01_P-001" (solid): 5279.47,9055.12 5515.69,9055.12 cw(c5515.69,8976.38) 5594.43,8976.38 cw(c5515.69,8976.38) 5515.69,8897.64 5279.47,8897.64 cw(c5279.47,8976.38) 5200.73,8976.38 cw(c5279.47,8976.38)
no net on Top Solder "NONET_L01_P-001" (solid): 1539.31,9133.86 1775.53,9133.86 cw(c1775.53,9055.12) 1854.27,9055.12 cw(c1775.53,9055.12) 1775.53,8976.38 1539.31,8976.38 cw(c1539.31,9055.12) 1460.57,9055.12 cw(c1539.31,9055.12)
no net on Top Solder "NONET_L01_P-001" (solid): 1539.31,6141.73 1775.53,6141.73 cw(c1775.53,6063) 1854.27,6062.99 cw(c1775.53,6062.99) 1775.53,5984.25 1539.31,5984.25 cw(c1539.31,6062.99) 1460.57,6062.99 cw(c1539.31,6062.99)
no net on Top Solder "NONET_L01_P-001" (solid): 5279.47,6062.99 5515.69,6062.99 cw(c5515.69,5984.26) 5594.43,5984.25 cw(c5515.69,5984.25) 5515.69,5905.51 5279.47,5905.51 cw(c5279.47,5984.25) 5200.73,5984.25 cw(c5279.47,5984.25)
no net on Top Solder "NONET_L01_P-001" (solid): 1535.43,3149.61 1771.66,3149.61 cw(c1771.66,3070.87) 1850.39,3070.87 cw(c1771.65,3070.86) 1771.65,2992.13 1535.43,2992.13 cw(c1535.43,3070.87) 1456.69,3070.87 cw(c1535.43,3070.87)
no net on Top Solder "NONET_L01_P-001" (solid): 5279.47,3070.87 5515.69,3070.87 cw(c5515.69,2992.13) 5594.43,2992.13 cw(c5515.69,2992.12) 5515.69,2913.39 5279.47,2913.39 cw(c5279.47,2992.13) 5200.73,2992.13 cw(c5279.47,2992.13)
GND on Top Layer "NONET_L02_P-001" (solid, pour order 12): 3454.72,728.35 3454.72,1250 1919.29,1250 1919.29,1358.27 1141.73,1358.27 1141.73,531.5 2293.31,531.5 2293.31,383.86 2529.53,383.86 2529.53,728.35
DGND on Top Layer "NONET_L02_P-001" (solid, pour order 11): 2923.23,639.76 3474.41,639.76 3474.41,236.22 2923.23,236.22
GND on Top Layer "NONET_L01_P-001" (solid, pour order 8): 4076.5,7122.83 4194.61,7122.83 4194.61,875.98 4114.34,875.98 3415.35,875.98 3415.35,1072.83 4114.34,1072.83 4114.34,1256.66
NetJ2_sw_2_1 on Top Layer "NETJ2_SW_2_1_L01_P004" (solid, pour order 4): 1456.69,9280.59 1811.02,9280.59 ccw(c1811.02,9595.55) 2125.98,9595.55 2401.57,9595.55 2401.57,7508.94 2047.24,7508.94 ccw(c1181.1,7508.94) 1181.1,8375.08 1181.1,9005 cw(c1456.69,9005)
+12 on Top Layer "NONET_L01_P-001" (solid, pour order 9): 2952.76,1535.43 3110.24,1535.43 3089.04,1397.64 2952.76,1397.64
NetJ1_sw_2_1 on Top Layer "NETJ1_SW_2_1_L01_P007" (solid, pour order 7): 5275.59,9595.55 4645.67,9595.55 4645.67,7508.94 5078.74,7508.94 5078.74,7784.53 cw(c5669.29,7784.53) 5669.29,8375.08 5669.29,9201.85 ccw(c5275.59,9201.85)
NetJ1_sw_1_1 on Top Layer "NETJ1_SW_1_1_L01_P006" (solid, pour order 6): 5275.59,6603.43 4645.67,6603.43 4645.67,4516.81 5078.74,4516.81 5078.74,4792.4 cw(c5669.29,4792.4) 5669.29,5382.95 5669.29,6209.72 ccw(c5275.59,6209.72)
NetJ2_sw_1_1 on Top Layer "NETJ2_SW_1_1_L01_P003" (solid, pour order 3): 1456.69,6288.46 1811.02,6288.46 ccw(c1811.02,6603.42) 2125.98,6603.43 2401.57,6603.43 2401.57,4516.81 2204.72,4516.81 ccw(c1338.58,4516.81) 1338.58,5382.95 1181.1,5382.95 1181.1,6012.88 cw(c1456.69,6012.87)
NetJ2_sw_3_1 on Top Layer "NETJ2_SW_3_1_L01_P002" (solid, pour order 2): 1456.69,3307.09 1811.02,3307.09 ccw(c1811.02,3622.05) 2125.98,3622.05 2401.57,3622.05 2401.57,1535.43 2204.72,1535.43 ccw(c1338.58,1535.43) 1338.58,2401.57 1181.1,2401.57 1181.1,3031.5 cw(c1456.69,3031.5)
NetJ1_sw_3_1 on Top Layer "NETJ1_SW_3_1_L01_P005" (solid, pour order 5): 5275.59,3622.05 4645.67,3622.05 4645.67,1535.43 5078.74,1535.43 5078.74,1811.02 cw(c5669.29,1811.02) 5669.29,2401.57 5669.29,3228.35 ccw(c5275.59,3228.35)
no net on Bottom Solder "NONET_L02_P-001" (solid): 1574.8,2795.28 1181.1,2795.28 1181.1,2401.57 1574.8,2401.57
no net on Bottom Solder "NONET_L02_P-001" (solid): 5669.29,2795.28 5275.59,2795.28 5275.59,2401.57 5669.29,2401.57
NetJ2_sw_3_1 on Bottom Layer "NONET_L02_P-001" (solid, pour order 14): 1574.8,2795.28 1181.1,2795.28 1181.1,2401.57 1574.8,2401.57
NetJ1_sw_3_1 on Bottom Layer "NONET_L02_P-001" (solid, pour order 13): 5669.29,2795.28 5275.59,2795.28 5275.59,2401.57 5669.29,2401.57

## Keep-outs
Keep-Out Layer:
  the board outline again, w10

## Silkscreen, mask and mechanical layers (free items; w line width, h text height)
Top Overlay:
  drawing of 27 lines, arcs and shapes, not listed
Mechanical 13:
  drawing of 168 lines, arcs and shapes, not listed

## Text inside footprints (layer, text, board x,y; h text height)
U3: Top Overlay "*" at 3031.5,629.92 h50 r90; Mechanical 7 "0.154in/3.9mm" at 2948.31,597.88 h25 r90; Mechanical 7 "0.244in/6.2mm" at 2873.31,597.88 h25 r90; Mechanical 7 "0.39in/9.9mm" at 3250.69,875.91 h25 r90; Mechanical 7 "0.05in/1.27mm" at 3100.69,303.52 h25 r90; Mechanical 7 "0.05in/1.27mm" at 3553.07,504.77 h25 r90; Mechanical 7 "Alt 1 Padstyle: OX60Y90D30P" at 3873.07,341.63 h50 r90; Mechanical 7 "Alt 2 Padstyle: OX90Y60D30P" at 3933.07,341.63 h50 r90; Mechanical 7 "Pin One Padstyle: RX85p87Y22p08D0T" at 3693.07,254.13 h50 r90; Mechanical 7 "Default Padstyle: RX85p87Y22p08D0T" at 3633.07,254.13 h50 r90; Mechanical 13 "*" at 3096.31,604.86 h50 r90